# Altium PCB sensor_interfacing_final.PcbDoc
Units mm, origin at the board's own origin, x right, y up, seen from the top; angles counter-clockwise.
Board outline 70 x 70 mm, 2 copper layers (Top Layer, Bottom Layer); 22 components, 22 nets, 71 pads, 14 vias.
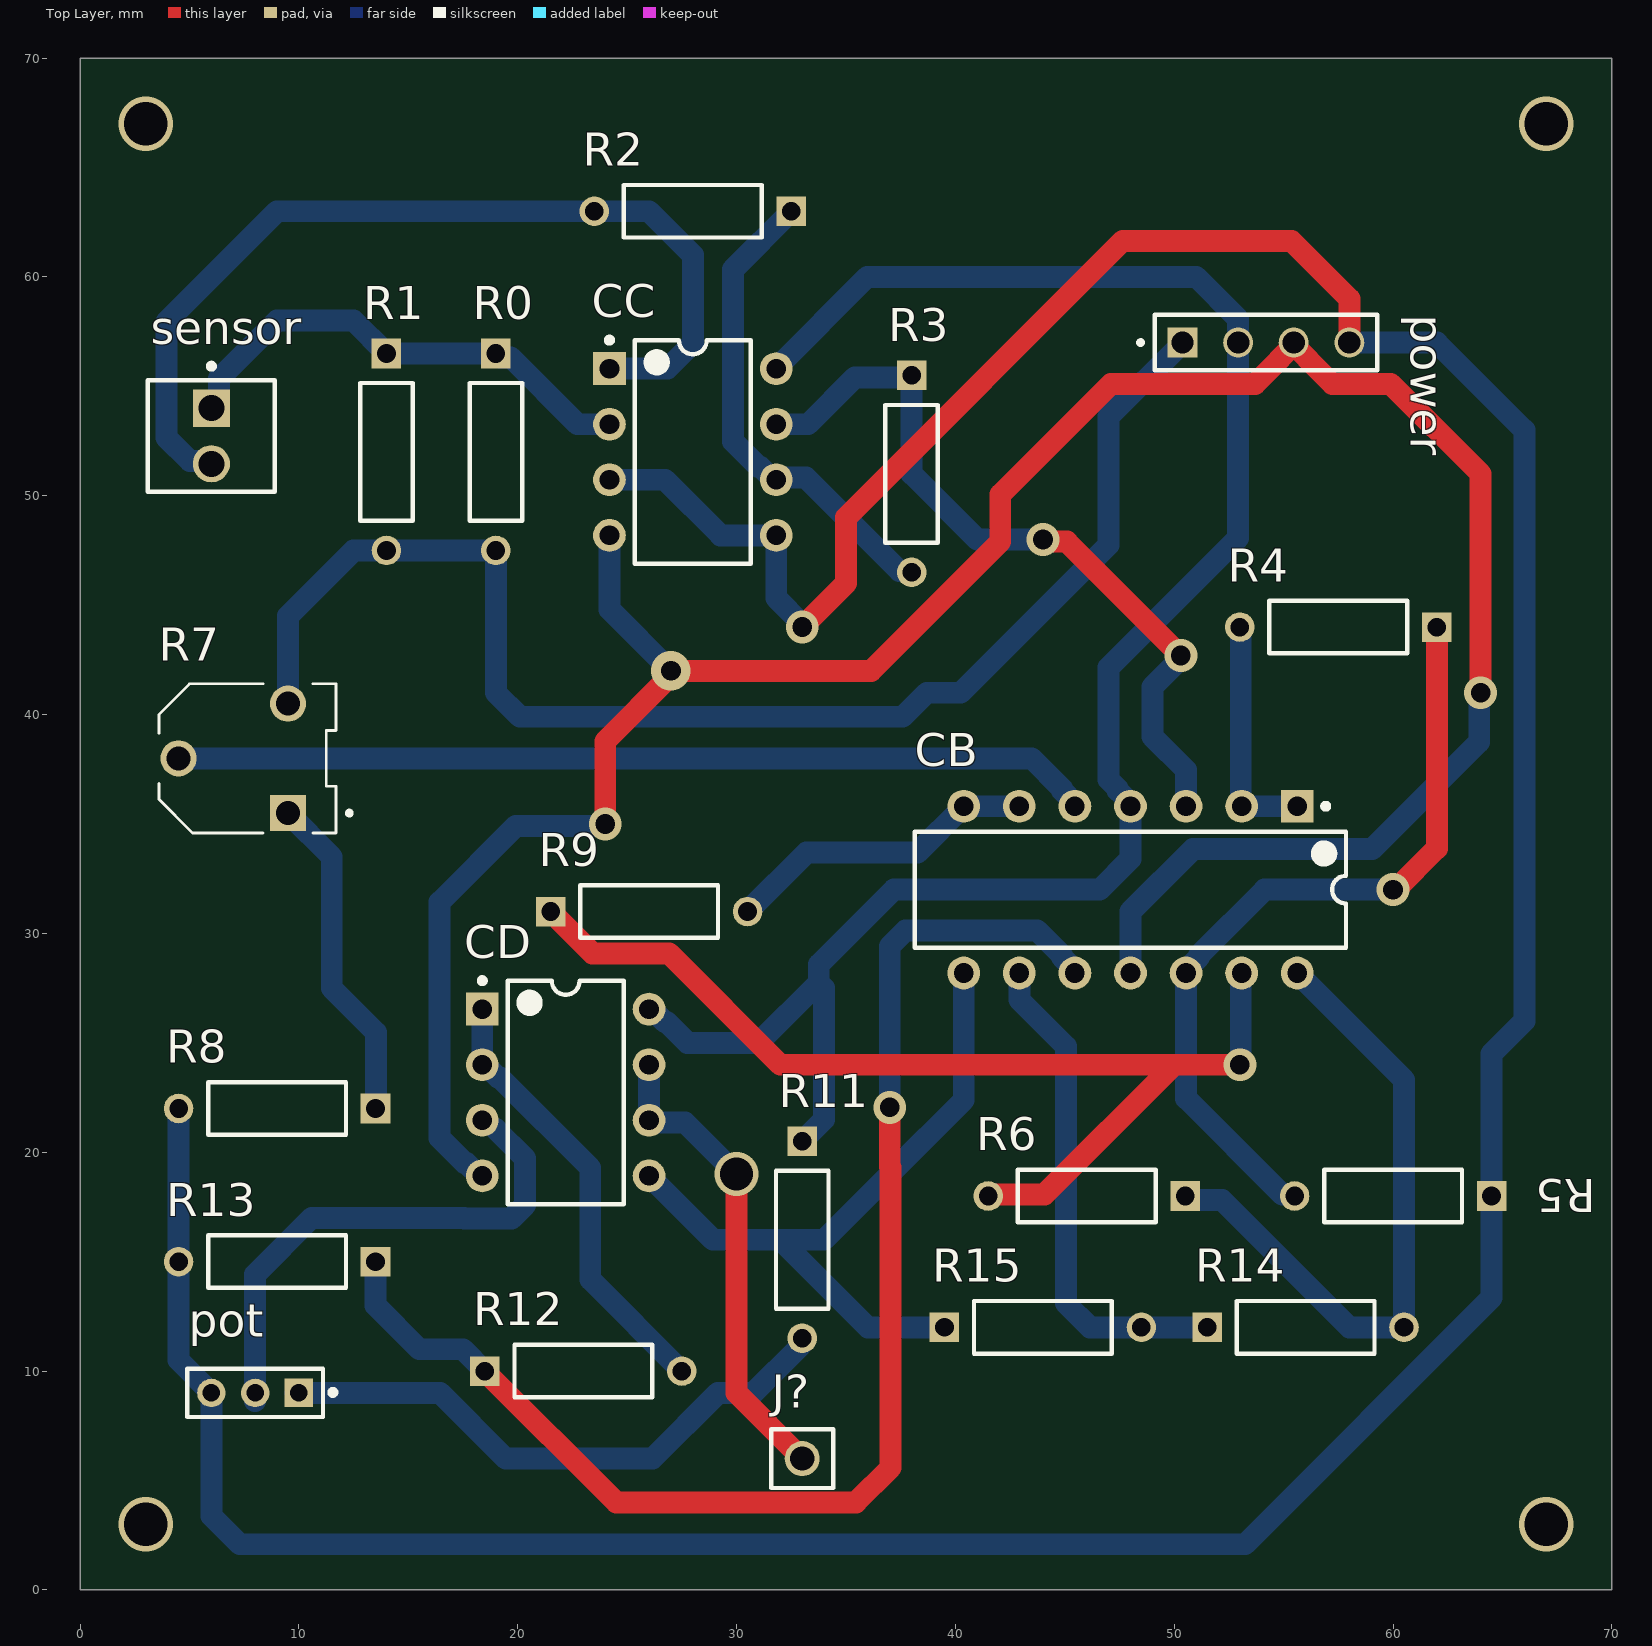
[diagram p0: Top Layer view]
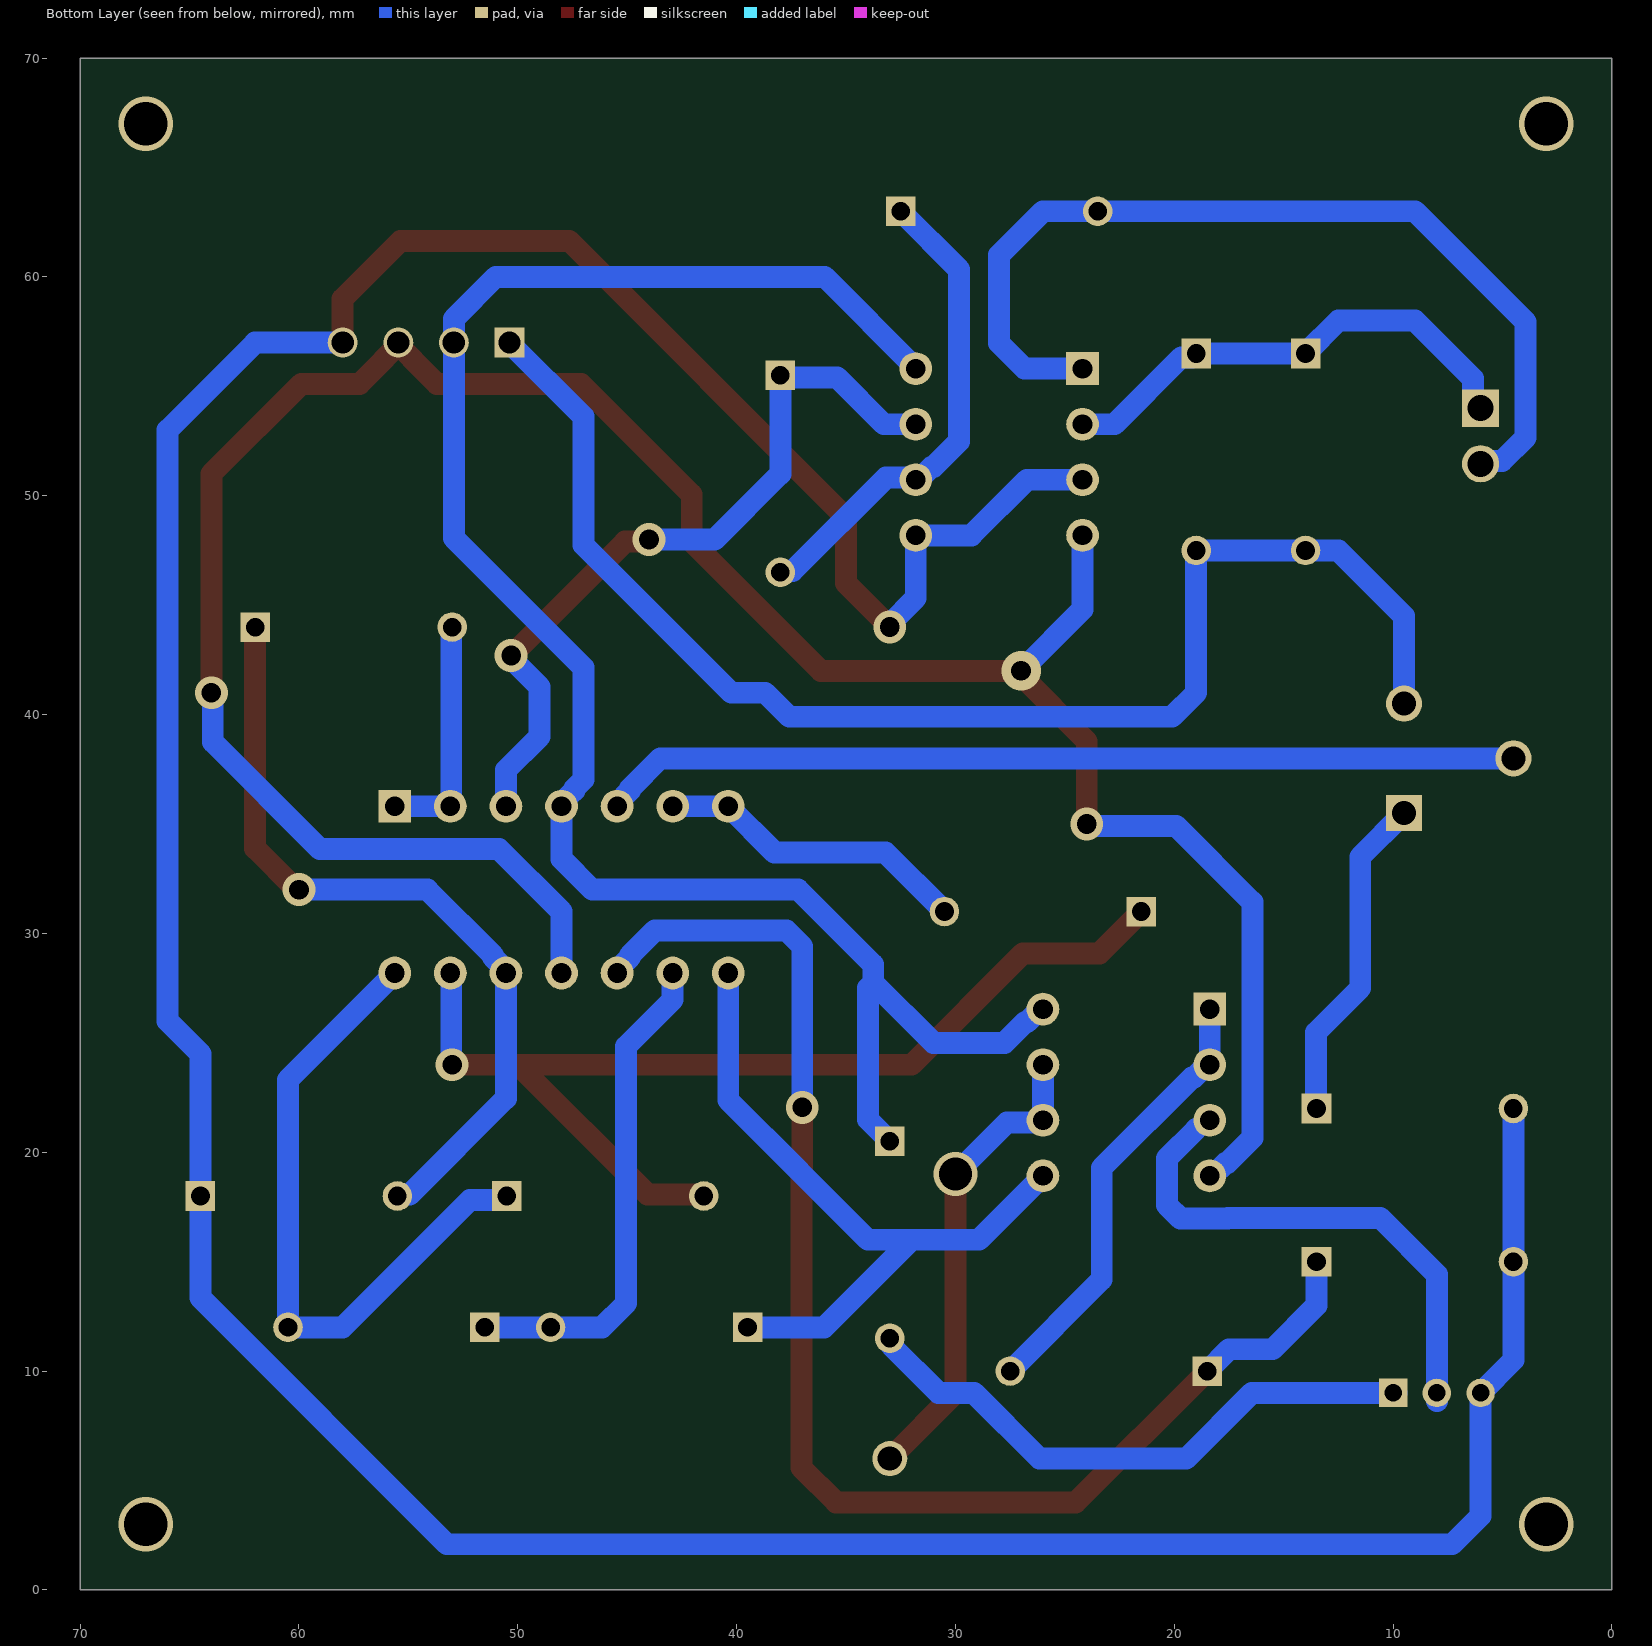
[diagram p1: Bottom Layer view, seen from below]

## Layer stack, top to bottom
Top Solder: solder mask 0.0102, Solder Resist, Dk 3.5
Top Layer: signal copper 0.0356
Dielectric 1: dielectric 0.32, FR-4, Dk 4.8
Bottom Layer: signal copper 0.0356
Bottom Solder: solder mask 0.0102, Solder Resist, Dk 3.5

## Board outline
0,0 70,0 70,70 0,70

## Design rules (kind name [scope] priority, off if disabled: settings)
Clearance [All] p1: gap=0.7 ignorepadtopadclearanceinfootprint=FALSE
PolygonConnect [All] p1: connectstyle=Relief reliefconductorwidth=0.254 reliefentries=4 polygonreliefangle="90 Angle" airgapwidth=0.254
RoutingVias [All] p1: holewidth=0.9 width=1.5 viastyle="Through Hole" minholewidth=0.7 minwidth=1 maxholewidth=2 maxwidth=2
SolderMaskExpansion [All] p1: expansion=0.102 istentingtop=FALSE
Width [All] p1: maxlimit=1.2 minlimit=0.8 preferedwidth=1
30 further rules are at their usual default settings.

## Components (designator, comment, footprint, x,y, rotation, side; value= is the part's Value field where it differs from the comment)
CB "TL084CN" N0014A 48,32 r270 top
CC "NE5532P" P0008A 28,52 r0 top
CD "NE5532P" P0008A 22.19,22.73 r0 top
J? "61300111121" 61300111121 33,6 r0 top
pot "951103-8622-AR" FP-951103-8622-AR-MFG 8,9 r180 top
power "TSW-104-23-F-S" SAMTEC_TSW-104-23-F-S 50.38,57 r0 top
R0 "5k" RESA60-630X240 19,52 r270 top
R1 "5k" RESA60-630X240 14,52 r270 top
R2 "10k" RESA60-630X240 28,63 r180 top
R3 "60k" RESA60-630X240 38,51 r270 top
R4 "1k" RESA60-630X240 57.5,44 r180 top
R5 "10k" RESA60-630X240 60,18 r180 top
R6 "10k" RESA60-630X240 46,18 r180 top
R7 "3306F-1-105" TRIM_3306F-1-105 7,38 r180 top
R8 "1k" RESA60-630X240 9,22 r180 top
R9 "1k" RESA60-630X240 26,31 r0 top
R11 "714" RESA60-630X240 33,16 r270 top
R12 "1k" RESA60-630X240 23,10 r0 top
R13 "1k" RESA60-630X240 9,15 r180 top
R14 "1k" RESA60-630X240 56,12 r0 top
R15 "1k" RESA60-630X240 44,12 r0 top
sensor "22-27-2021" MOLX-22-27-2021_V 6,52.73 r270 top

## Footprints (in the part's own frame and the unit in brackets; to place one, negate y for a bottom-side part, rotate by r counter-clockwise, add the part's x,y. Pads: shape width x height; smd on the part's side, far side on the other; paste and mask are expansions set on the pad)
61300111121 [mm] "Pin Header, pitch 2.54 mm, THT, Vertical, single row, 1p"
  round 1.6 hole 1.1: 1(0,0)
  silkscreen extent -1.42,-1.35 1.42,1.35, body extent -1.27,-1.27 1.27,1.27, height 8.57
FP-951103-8622-AR-MFG [mm]
  rect 1.3x1.3 hole 0.8 paste-1000 mask+0: 1(-2,0)
  round 1.3 hole 0.8 paste-1000 mask+0: 2(0,0) 3(2,0)
  silkscreen extent -3.68,-1.1 3.1,1.1, body extent -3.2,-1.2 3.2,1.2, height 0.25
MOLX-22-27-2021_V [mm] "Header, 2-Leads, Body 5.8x5.08mm"
  rect 1.7x1.7 hole 1.19: 1(-1.27,0)
  round 1.7 hole 1.19: 2(1.27,0)
  silkscreen extent -3.31,-2.9 2.54,2.9, body extent -2.54,-2.9 2.54,2.9, height 11.72
N0014A [mm] "DIP, 14-Leads, Body 19.7x6.6mm, Pitch 2.54mm"
  rect 1.5x1.5 hole 0.9: 1(-3.81,7.62)
  round 1.5 hole 0.9: 2(-3.81,5.08) 3(-3.81,2.54) 4(-3.81,0) 5(-3.81,-2.54) 6(-3.81,-5.08) 7(-3.81,-7.62) 8(3.81,-7.62) 9(3.81,-5.08) 10(3.81,-2.54) 11(3.81,0) 12(3.81,2.54) 13(3.81,5.08) 14(3.81,7.62)
  silkscreen extent -3.93,-9.85 2.65,9.85, body extent -3.95,-9.85 3.95,9.85, height 5.08
P0008A [mm] "DIP, 8-Leads, Body 10.15x6.6mm, Pitch 2.54mm"
  rect 1.5x1.5 hole 0.9: 1(-3.81,3.81)
  round 1.5 hole 0.9: 2(-3.81,1.27) 3(-3.81,-1.27) 4(-3.81,-3.81) 5(3.81,-3.81) 6(3.81,-1.27) 7(3.81,1.27) 8(3.81,3.81)
  silkscreen extent -3.93,-5.1 2.65,5.23, body extent -3.95,-5.07 3.95,5.07, height 5.08
RESA60-630X240 [mm] "Axial Resistor, 2-Leads, Dia 2.4mm, Body Length 6.3mm"
  rect 1.35x1.35 hole 0.85: 1(-4.5,0)
  round 1.35 hole 0.85: 2(4.5,0)
  silkscreen extent -3.15,-1.2 3.15,1.2, body extent -3.15,-1.2 3.15,1.2, height 2.4
SAMTEC_TSW-104-23-F-S [mm]
  rect 1.37x1.37 / inner round 1.37 / far side rect 1.37x1.37 hole 1.02: 01(0,0)
  round 1.37 hole 1.02: 02(2.54,0) 03(5.08,0) 04(7.62,0)
  silkscreen extent -2.02,-1.27 8.89,1.27
TRIM_3306F-1-105 [mm]
  rect 1.65x1.65 hole 1.1: 1(-2.5,2.5)
  round 1.65 hole 1.1: 2(2.5,0) 3(-2.5,-2.5)
  silkscreen extent -5.4,-3.4 3.4,3.41, body extent -4.7,-3.4 3.4,3.4, height 8.38

## Part data
CB: library part CMP-0017-00818-2, "JFET-Input Operational Amplifier, 7 to 36 V, 0 to 70 degC, 14-pin DIP (N14), Pb-Free (RoHS)", Manufacturer="Texas Instruments", Rating=Catalog, Total Supply Voltage(Max)(+5V is 5, +/-5V is 10)=36, Total Supply Voltage(Min)(+5V is 5, +/-5V is 10)=7, CMRR(Min)(dB)=70, Code_JEDEC=MS-001, ComponentLink1Description="Manufacturer URL", ComponentLink1URL=http://www.ti.com/, ComponentLink2Description=Datasheet, ComponentLink2URL=http://www.ti.com/lit/ds/symlink/tl084.pdf, ComponentLink3Description="Package Specification", ComponentLink3URL=http://www.ti.com/lit/ml/mpdi002c/mpdi002c.pdf, DatasheetVersion=SLOS081G, Eco-Plan="Pb-Free (RoHS)", GBW(Typ)(MHz)=3, IIB(Max)(pA)=400, Iq per channel(Max)(mA)=2.8, Mounting Technology="Through Hole", Number of Channels=4, Offset Drift(Typ)(uV/C)=18, PackageDescription="14-Pin Plastic In-Line, Body 19.305 x 6.35 mm, Pitch 2.54 mm", PackageReference=N0014A, PackageVersion="4040049/E, 12/2002", PartNumber=TL084CN, Slew Rate(Typ)(V/us)=13, Sub Family="General Purpose Amplifier, High Supply Voltage Amplifier (>=30V)", Vio (25C)(Max)(mV)=15, Vn at 1kHz(Typ)(nV/rtHz)=18
CC CD: library part CMP-0017-00910-2, "Dual Low-Noise High-Speed Audio Operational Amplifier, 10 to 30 V, 0 to 70 degC, 8-pin DIP (P8), Pb-Free (RoHS)", Manufacturer="Texas Instruments", Total Supply Voltage(Max)(+5V is 5, +/-5V is 10)=30, Total Supply Voltage(Min)(+5V is 5, +/-5V is 10)=10, CMRR(Min)(dB)=70, Code_JEDEC=MS-001, ComponentLink1Description="Manufacturer URL", ComponentLink1URL=http://www.ti.com/, ComponentLink2Description=Datasheet, ComponentLink2URL=http://www.ti.com/lit/ds/symlink/ne5532.pdf, ComponentLink3Description="Package Specification", ComponentLink3URL=http://www.ti.com/litv/pdf/mpdi001b, DatasheetVersion=SLOS075I, Eco-Plan="Pb-Free (RoHS)", GBW(Typ)(MHz)=10, IIB(Max)(pA)=800000, Iq per channel(Max)(mA)=4, Mounting Technology="Through Hole", Number of Channels=2, PackageDescription="8-Pin Plastic In-Line, Body 9.59 x 6.35 mm, Pitch 2.54 mm", PackageReference=P0008A, PackageVersion="4040082/E, 04/2010", PartNumber=NE5532P, Slew Rate(Typ)(V/us)=9, Sub Family="General Purpose Amplifier, High Supply Voltage Amplifier (>=30V), Low Noise Amp (<=10nV/rtHz)", Vio (25C)(Max)(mV)=4, Vn at 1kHz(Typ)(nV/rtHz)=5
J?: library part CMP-1502-01058-1, "THT Vertical Pin Header WR-PHD, Pitch 2.54 mm, Single Row, 1 pins", Contact Resistance=20mOhm, Manufacturer="Wurth Elektronik", Operating temperature=-40to105degC, Rated Current=3A, Withstanding Voltage=500VAC, Working Voltage=250VAC, Datasheet URL=https://katalog.we-online.de/em/datasheet/6130xx11121.pdf, Gender=Male, Manufacturer URL=http://www.we-online.de, Mounting Technology=THT, Orientation=Vertical, Package Reference=61300111121, Packaging=Bag, Part Number=61300111121, Pin Number=1, Pitch=2.54mm, Publisher=WurthElektronik, Row Number=Single
pot: library part CMP-05379-000003-1, "CONN HEADER VERT 3POS 2MM", Current Rating=2A, Manufacturer=3M, Temperature="-55°C to +125°C", Temperature Range High=+125°C, Temperature Range Low=-55°C, Automotive=No, Category=Conn, ComponentLink2Description=Datasheet, ComponentLink2URL=http://multimedia.3m.com/mws/media/1400506O/3m-pin-strip-header-951-series-78-5100-2653-3.pdf, Conn Gender=Male, Conn Orientation=Straight, Contact Material=Gold,Nickel, Device Class L1=Connectors, Device Class L2="Headers and Wire Housings", Device Class L3=unset, Digikey Description="CONN HEADER VERT 3POS 2MM", Height=6.3mm, Lead Free=Yes, Manufacturer Part Number=951103-8622-AR, Mouser Description="Header; PinStrip; CopperAlloy; HighTempThermoplastic; 3Cnts; 1A; RtAngle; 951Series", Number of Contacts=3, Number of Rows=1, Octopart=https://octopart.com/951103-8622-ar-3m-14400669, Package=951103-8622-AR, Pitch=2mm, RoHS=TRUE
power: "Connector Header Through Hole 4 position 0.100 (2.54mm)", Package=None, Availability="In Stock", Check_prices=https://www.snapeda.com/parts/TSW-104-23-F-S/Samtec/view-part/?ref=eda, MF=Samtec, MP=TSW-104-23-F-S, Price=None, Purchase-URL=https://pricing.snapeda.com/search/part/TSW-104-23-F-S/?ref=eda, SnapEDA_Link=https://www.snapeda.com/parts/TSW-104-23-F-S/Samtec/view-part/?ref=snap
R0 R1 R2 R3 R4 R5 R6 R8 R9 R11 R12 R13 R14 R15: library part CMP-1659-00075-1, "Axial Resistor, 1 KOhm, +/- 1%, 250 mW, -55 to 155 degC, 2-Pin THD, RoHS, Bulk", Case\Package=Axial, Max Operating Temperature="155 degC", Min Operating Temperature="-55 degC", Package Quantity=200, Power Rating="250 mW", Resistance="10 kohm", Tolerance=1%, Voltage Rating="250 V", ComponentLink1Description="Manufacturer URL", ComponentLink1URL=http://www.yageo.com/, ComponentLink2Description=Datasheet, ComponentLink2URL=http://www.yageo.com/documents/recent/Yageo%20LR_MFR_2013.pdf, DatasheetVersion=Apr-13, Length="0.248 inch", PackageDescription="2-Pin Axial Lead, Dia 2.4 mm, Body Length 6.3 mm", PackageReference=MFR-25, Packaging=Bulk, RoHSCompliant=true
R7: "1 MOhms 0.2W, 1/5W PC Pins Through Hole Trimmer Potentiometer Cermet 1 Turn Top Adjustment", Package="3306F Bourns", Availability=Good, Check_prices=https://www.snapeda.com/parts/3306F-1-105/Bourns%20-%20J.W.%20Miller/view-part/862876/?ref=eda, MF=Bourns, MP=3306F-1-105, Price=None, Purchase-URL=https://pricing.snapeda.com/search/part/3306F-1-105/?ref=eda, SnapEDA_Link=https://www.snapeda.com/parts/3306F-1-105/Bourns%20-%20J.W.%20Miller/view-part/862876/?ref=snap
sensor: library part CMP-2000-05537-1, "Male Header, Pitch 2.54 mm, 1 x 2 Position, Height 11.7 mm, Tail Length 3.56 mm, 0 to 75 degC, RoHS, Bulk", Current - Max=4A, Manufacturer=Molex, Operating temperature=0°Cto+75°C, Package Description="2-Leads Header, Body 5.08 x 5.8 mm, Pitch 2.54 mm", Package Version="Rev. BC, 02/2012", PartNumber=0022272021, Voltage - Max=250V, Contact Material=Tinplatedbrass, Current Rating=4A, Datasheet URL=http://www.molex.com/pdm_docs/sd/022272021_sd.pdf, Datasheet Version="Rev. F, 06/2009", Housing Material=Nylon(UL94V-0), Manufacturer URL=http://www.molex.com/, Mounting Technology=ThroughHole, No. of Positions=2, No. of Rows=1, Orientation=Vertical, Package Reference=22-27-2021, Pitch=2.54mm, Voltage Rating=250V

## Via types
v1: diameter 1.5, hole 0.9, Top Layer to Bottom Layer, 8 vias
v2: diameter 2.5, hole 2, Top Layer to Bottom Layer, 4 vias
v3: diameter 1.8, hole 0.9, Top Layer to Bottom Layer, 1 vias
v4: diameter 2, hole 1.5, Top Layer to Bottom Layer, 1 vias

## Nets (pads, with @x,y where several pads share a name; then routed paths per layer and width w, separated by ;. In a path a pad name is that pad's centre, name@x,y a point inside that pad or via, vN(x,y) a via of type N, cw(c..) or ccw(c..) an arc to the next point about the centre after c; other vN are vias at no path point)
5V: power.01 R0.2 R1.2 R7.3 | length 63.6
  Bottom Layer w1: R7.3 9.5,44.5 12.5,47.5 R1.2 R0.2 19,41 20.1,39.9 37.596,39.9 38.696,41 40.242,41 47,47.758 47,53.62 power.01
+12V: CB.4 CC.8 CD.8 power.02 R11.1 | length 85.2
  Bottom Layer w1: CD.8 26.135,26.54 26.725,25.95 26.808,25.95 27.758,25 31,25 33.754,27.754 33.754,28.572 37.182,32 46.596,32 48,33.404 CB.4 48,35.945 47.41,36.535 47.41,36.618 47,37.028 47,42.152 52.92,48.072 power.02 ; CC.8 31.81,55.833 35.977,60 51,60 52.915,58.085 power.02@52.915,57 ; R11.1 34,21.5 34,27.507
-12V: CB.11 CC.4 CD.4 power.03 | length 119.5
  Top Layer w1: v1(24,35) 24,38.784 27,41.784 v3(27,42) 36.152,42 42.05,47.898 42.05,50.05 47.115,55.115 53.701,55.115 54.805,56.219 54.805,56.229 54.805,56.245 power.03@55.46,56.9 ; CC.4 CC.4@24.286,48.094 ; power.03 power.03@55.46,56.9 ; v1(64,41) 64,51 59.885,55.115 57.219,55.115 56.115,56.219 56.115,56.245 power.03@55.46,56.9
  Bottom Layer w1: CD.4 18.245,18.92 17.655,19.51 17.572,19.51 16.43,20.652 16.43,31.43 19.909,34.909 23.909,34.909 v1(24,35) ; CC.4 24.19,44.81 v3(27,42) ; CB.11 48,31 50.86,33.86 54.373,33.86 59.049,33.86 63.939,38.75 63.939,40.939 v1(64,41)
GND: CC.3 CC.5 pot.3 power.04 R5.1 R8.2 R13.2 | length 183.5
  Top Layer w1: CC.5@31.81,48.055 CC.5 ; v1(33,44) 35,46 35,49 47.649,61.649 55.351,61.649 58,59 power.04
  Bottom Layer w1: R8.2 R13.2 4.5,10.5 pot.3 6,3.381 7.296,2.086 53.237,2.086 64.5,13.348 64.5,16 R5.1 64.5,24.5 66,26 66,53 62,57 power.04 ; CC.3 26.73,50.73 29.27,48.19 CC.5 31.81,45.325 33,44.135 v1(33,44)
NetCB_1: CB.1 CB.2 R4.2 | length 10.8
  Bottom Layer w1: R4.2 53.04,43.96 53.04,35.85 CB.2 CB.1
NetCB_3: CB.3 CC.7 R3.1 | length 35.4
  Top Layer w1: v1(44,48) 44.096,47.904 45.096,47.904 v1(50.303,42.697)
  Bottom Layer w1: CC.7 33.27,53.27 35.404,55.404 35.795,55.404 37.904,55.404 R3.1 38,51 41,48 v1(44,48) ; v1(50.303,42.697) 50.303,42.562 49,41.259 49,39 50.54,37.46 CB.3
NetCB_5: CB.5 R7.2 | length 42
  Bottom Layer w1: R7.2 43.488,38 44.87,36.618 44.87,36.535 45.46,35.945 CB.5
NetCB_6: CB.6 CB.7 R9.2 | length 14.4
  Bottom Layer w1: R9.2 33.2,33.7 38.27,33.7 CB.7 CB.6
NetCB_8: CB.8 CD.5 R15.1 | length 33.3
  Bottom Layer w1: CD.5 28.92,16 32,16 ; 37.103,19.103 40.38,22.38 CB.8 ; 37.206,19.206 34,16 32,16 ; R15.1 36,12 32,16
NetCB_9: CB.9 R14.1 R15.2 | length 22.9
  Bottom Layer w1: CB.9 42.92,26.971 45.05,24.841 45.05,13.101 46.151,12 R15.2 R14.1
NetCB_10: CB.10 R12.1 R13.1 | length 63.5
  Top Layer w1: R12.1 24.5,4 35.453,4 37.039,5.586 37.039,19.3 37,19.339 v1(37,22.05)
  Bottom Layer w1: R13.1 13.5,13 15.5,11 17.5,11 R12.1 ; v1(37,22.05) 37,29.414 37.726,30.14 43.728,30.14 44.87,28.998 44.87,28.915 45.46,28.325 CB.10
NetCB_12: CB.12 R4.1 R5.2 | length 36.6
  Top Layer w1: v1(60,32) 60.111,32 62,33.889 R4.1
  Bottom Layer w1: R5.2 55.433,18.067 54.933,18.067 50.54,22.46 50.54,28.325 51.13,28.915 51.13,28.998 54.132,32 v1(60,32)
NetCB_13: CB.13 R6.2 R9.1 | length 49.6
  Top Layer w1: R9.1 23.414,29.086 26.914,29.086 32,24 50,24 ; R6.2 41.567,18.067 44.067,18.067 50,24 ; v1(53,24) 50,24
  Bottom Layer w1: v1(53,24) 53.04,24.04 53.04,28.15 CB.13
NetCB_14: CB.14 R6.1 R14.2 | length 30.9
  Bottom Layer w1: R6.1 50.675,17.825 52.175,17.825 58,12 R14.2 60.5,23.31 CB.14@55.481,28.329
NetCC_1: CC.1 R2.2 sensor.2 | length 43.1
  Bottom Layer w1: sensor.2 5.866,51.594 5.009,51.594 3.95,52.653 3.95,57.95 9,63 R2.2 26,63 28,61 28,56.972 26.838,55.81 CC.1
NetCC_2: CC.2 R0.1 R1.1 sensor.1 | length 22.4
  Bottom Layer w1: sensor.1 6.35,54.35 6.35,55.35 9,58 12.5,58 R1.1 R0.1 19.175,56.325 19.675,56.325 22.73,53.27 CC.2
NetCC_6: CC.6 R2.1 R3.2 | length 22.3
  Bottom Layer w1: R2.1 29.838,60.338 29.838,52.485 31.002,51.32 31.085,51.32 31.675,50.73 CC.6 31.906,50.826 33.174,50.826 37.433,46.567 37.933,46.567 R3.2
NetCD_1: CD.1 CD.2 R12.2 | length 20.6
  Top Layer w1: CD.2 CD.2@18.515,24
  Bottom Layer w1: CD.1 CD.2 18.515,24 19.105,23.41 19.188,23.41 23.31,19.287 23.31,14.19 R12.2
NetCD_3: CD.3 pot.2 | length 23.6
  Bottom Layer w1: pot.2@8,8.618 8,14.414 10.586,17 17.542,17 17.572,16.97 19.714,16.97 20.33,17.586 20.33,19.728 CD.3@18.999,21.059 ; CD.3@18.245,21.46 CD.3
Netpot_1: pot.1 R11.2 | length 26.8
  Bottom Layer w1: pot.1@9.85,9 16.453,9 19.453,6 26.152,6 29.152,9 30.767,9 32.933,11.166 32.933,11.433 R11.2
NetR7_1: R7.1 R8.1 | length 15
  Bottom Layer w1: R7.1 11.5,33.5 11.5,27.5 13.514,25.486 R8.1@13.514,22.161
Output: CD.6 CD.7 J?.1 | length 21.8
  Top Layer w1: v4(30,19) 30,9 J?.1
  Bottom Layer w1: CD.7 CD.6 26.096,21.364 27.636,21.364 v4(30,19)
copper on no net:
  other v2: 3,3 67,3 3,67 67,67